# EAGLE board water level (EAGLE 6.1)
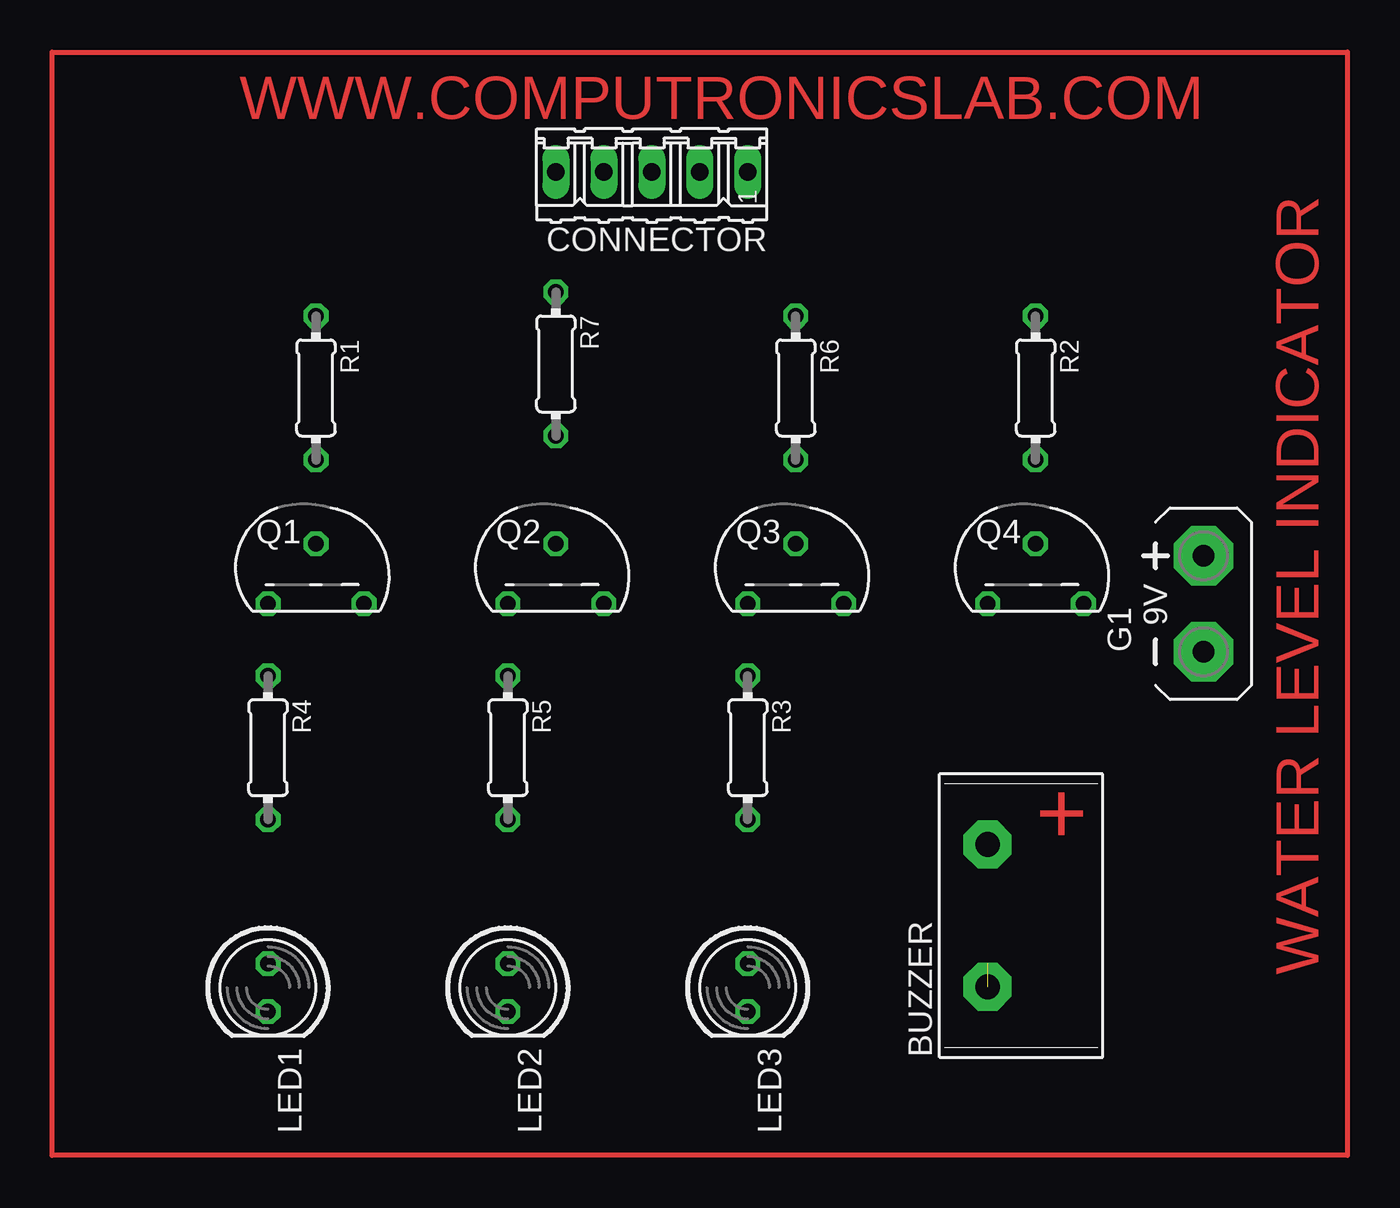
[diagram p0: board, top side]
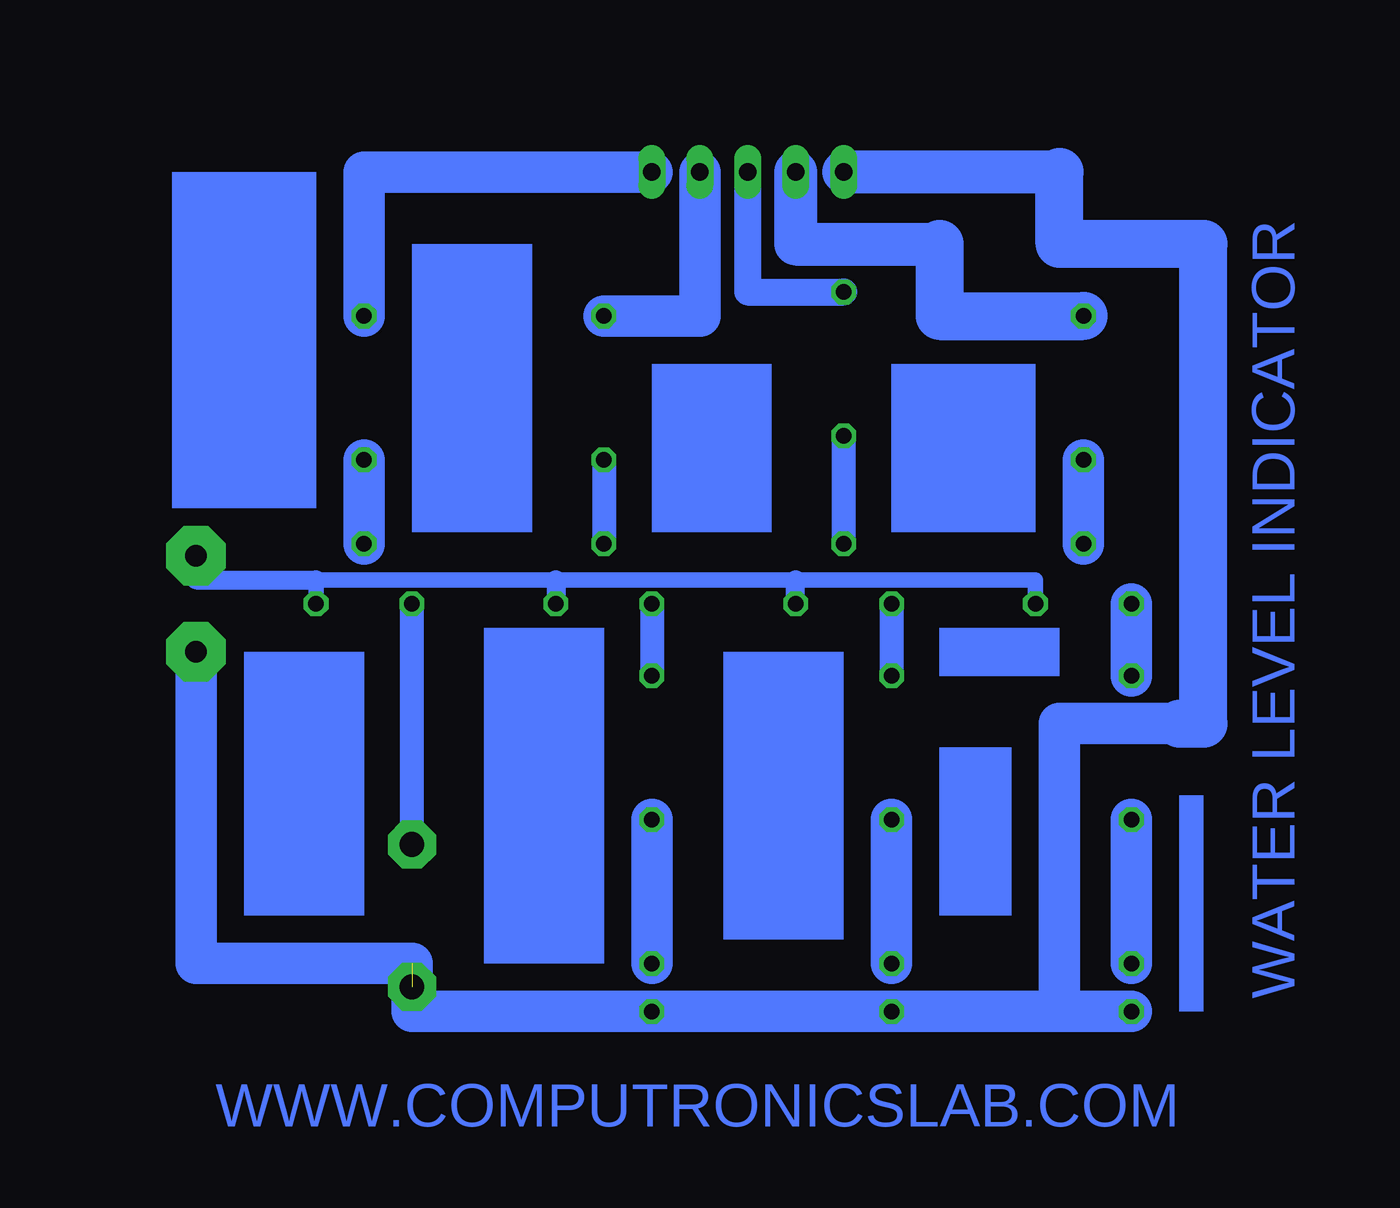
[diagram p1: board, bottom side, seen from below]

No outline drawn. Coordinates in mm, seen from the top.
Copper layers (1*16): Top 0.035mm / dielectric 1.5mm / Bottom 0.035mm
Design rules: minimum track width 10mil, minimum drill 24mil, track to track 8mil, track to pad 8mil, pad to pad 8mil, via to via 8mil, smd to smd 8mil, copper to edge 40mil, drill to drill 8mil, minimum pad ring 10mil, minimum via ring 8mil, stop-mask expansion 4mil, vias tented up to drill 0mil, thermal gap 10mil

## Footprints (pad centres in the part's own frame; a part is rotated, then mirrored left to right if it is on the bottom)
B/C11S = drill 1.321 pad 2.54 octagon: 1 -3.759,0; 2 3.759,0
05P = drill 0.914 long: 1 -5.08,0; 2 -2.54,0; 3 0,0; 4 2.54,0; 5 5.08,0
AB9V = drill 1.118 pad 3.15 octagon: + 0,2.54; - 0,-2.54
LED5MM = drill 0.813 octagon: A -1.27,0; K 1.27,0
TO92 = drill 0.813 octagon: 1 2.54,-1.27; 2 0,1.905; 3 -2.54,-1.27
0204/7 = drill 0.813 octagon: 1 -3.81,0; 2 3.81,0

## Placement (x,y rotation side)
BUZZER  B/C11S  [B/C11S]  60.96,19.05 90 top
CONNECTOR  [05P]  43.18,58.42 180 top
G1  AB9V  [AB9V]  72.39,35.56 0 top
LED1  5mm  [LED5MM]  22.86,15.24 270 top
LED2  5mm  [LED5MM]  35.56,15.24 270 top
LED3  5mm  [LED5MM]  48.26,15.24 270 top
Q1  BC557  [TO92]  25.4,36.83 0 top
Q2  BC557  [TO92]  38.1,36.83 0 top
Q3  BC557  [TO92]  50.8,36.83 0 top
Q4  BC557  [TO92]  63.5,36.83 0 top
R1  470E  [0204/7]  25.4,46.99 270 top
R2  470E  [0204/7]  63.5,46.99 270 top
R3  470E  [0204/7]  48.26,27.94 270 top
R4  470E  [0204/7]  22.86,27.94 270 top
R5  470E  [0204/7]  35.56,27.94 270 top
R6  470E  [0204/7]  50.8,46.99 270 top
R7  470E  [0204/7]  38.1,48.26 270 top

## Library data of the parts
BUZZER = buzzer; OC_FARNELL: unknown; OC_NEWARK: unknown
CONNECTOR = con-amp-quick; OC_FARNELL: unknown; OC_NEWARK: unknown
G1 = battery
LED1-LED3 = led
Q1-Q4 = transistor-pnp
R1-R7 = eagle-ltspice; SPICEMODEL: NONE; SPICEPREFIX: R

## Nets
N$1: Q1.3 R4.1
N$2: Q2.3 R5.1
N$3: Q3.3 R3.1
N$4: Q1.2 R1.2
N$5: Q2.2 R7.2
N$6: Q3.2 R6.2
N$7: Q4.2 R2.2
N$8: BUZZER.2 Q4.3
N$9: LED1.A R4.2
N$11: LED3.A R3.2
N$12: G1.+ Q1.1 Q2.1 Q3.1 Q4.1
N$13: BUZZER.1 CONNECTOR.5 G1.- LED1.K LED2.K LED3.K
N$14: CONNECTOR.2 R6.1
N$15: CONNECTOR.3 R7.1
N$16: CONNECTOR.4 R1.1
N$17: CONNECTOR.1 R2.1
N$18: LED2.A R5.2

## Tracks (layer width: path | path; a pad name or v marks a point on that pad's centre or on a via)
N$1
  Bottom 2.184: Q1.3 R4.1
N$2
  Bottom 1.27: Q2.3 R5.1
N$3
  Bottom 1.27: Q3.3 R3.1
N$4
  Bottom 2.184: R1.2 Q1.2
N$5
  Bottom 1.27: R7.2 Q2.2
N$6
  Bottom 1.27: R6.2 Q3.2
N$7
  Bottom 2.184: R2.2 Q4.2
N$8
  Bottom 1.27: BUZZER.2 Q4.3
N$9
  Bottom 2.184: R4.2 LED1.A
N$10
  Top 0.254: 11.43,64.77 80.01,64.77 80.01,6.35 11.43,6.35 11.43,64.77
N$11
  Bottom 2.184: R3.2 LED3.A
N$12
  Bottom 0.813: Q1.1 27.94,36.83 40.64,36.83 53.34,36.83 66.04,36.83 Q4.1
  Bottom 1.016: G1.+ 72.39,36.83 66.04,36.83 | Q2.1 40.64,36.83 | 53.34,36.83 Q3.1
N$13  (1 unrouted)
  Bottom 2.184: 26.67,13.97 LED2.K LED3.K 60.96,13.97 60.96,16.51 72.39,16.51 G1.- | 26.67,13.97 LED1.K | 26.67,13.97 26.67,29.21 20.32,29.21
  Bottom 2.286: 26.67,58.42 CONNECTOR.5
  Bottom 2.54: 20.32,29.21 19.05,29.21 19.05,54.61 20.32,54.61 26.67,54.61 26.67,58.42
N$14
  Bottom 0.254: 45.72,50.8 45.72,52.07 45.72,50.8
  Bottom 2.184: R6.1 45.72,50.8 45.72,55.88 CONNECTOR.2
N$15
  Bottom 1.422: R7.1 43.18,52.07 43.18,53.34 43.18,57.15 CONNECTOR.3
N$16
  Bottom 2.286: CONNECTOR.4 40.64,54.61 33.02,54.61
  Bottom 2.54: 33.02,54.61 33.02,50.8 R1.1
N$17
  Bottom 2.184: CONNECTOR.1 63.5,58.42 R2.1
N$18
  Bottom 2.184: R5.2 LED2.A
(copper drawn outside any net)
  shapes: Bottom area x10

## Text on the board
Top: WWW.COMPUTRONICSLAB.COM | WATER LEVEL INDICATOR | +
Bottom: WATER LEVEL INDICATOR | WWW.COMPUTRONICSLAB.COM